# Altium PCB PCB.PcbDoc
Units mil, origin at the board's own origin, x right, y up, seen from the top; angles counter-clockwise.
Board outline 2345 x 2670 mil, 2 copper layers (Top Layer, Bottom Layer); 22 components, 27 nets, 129 pads, 10 vias.
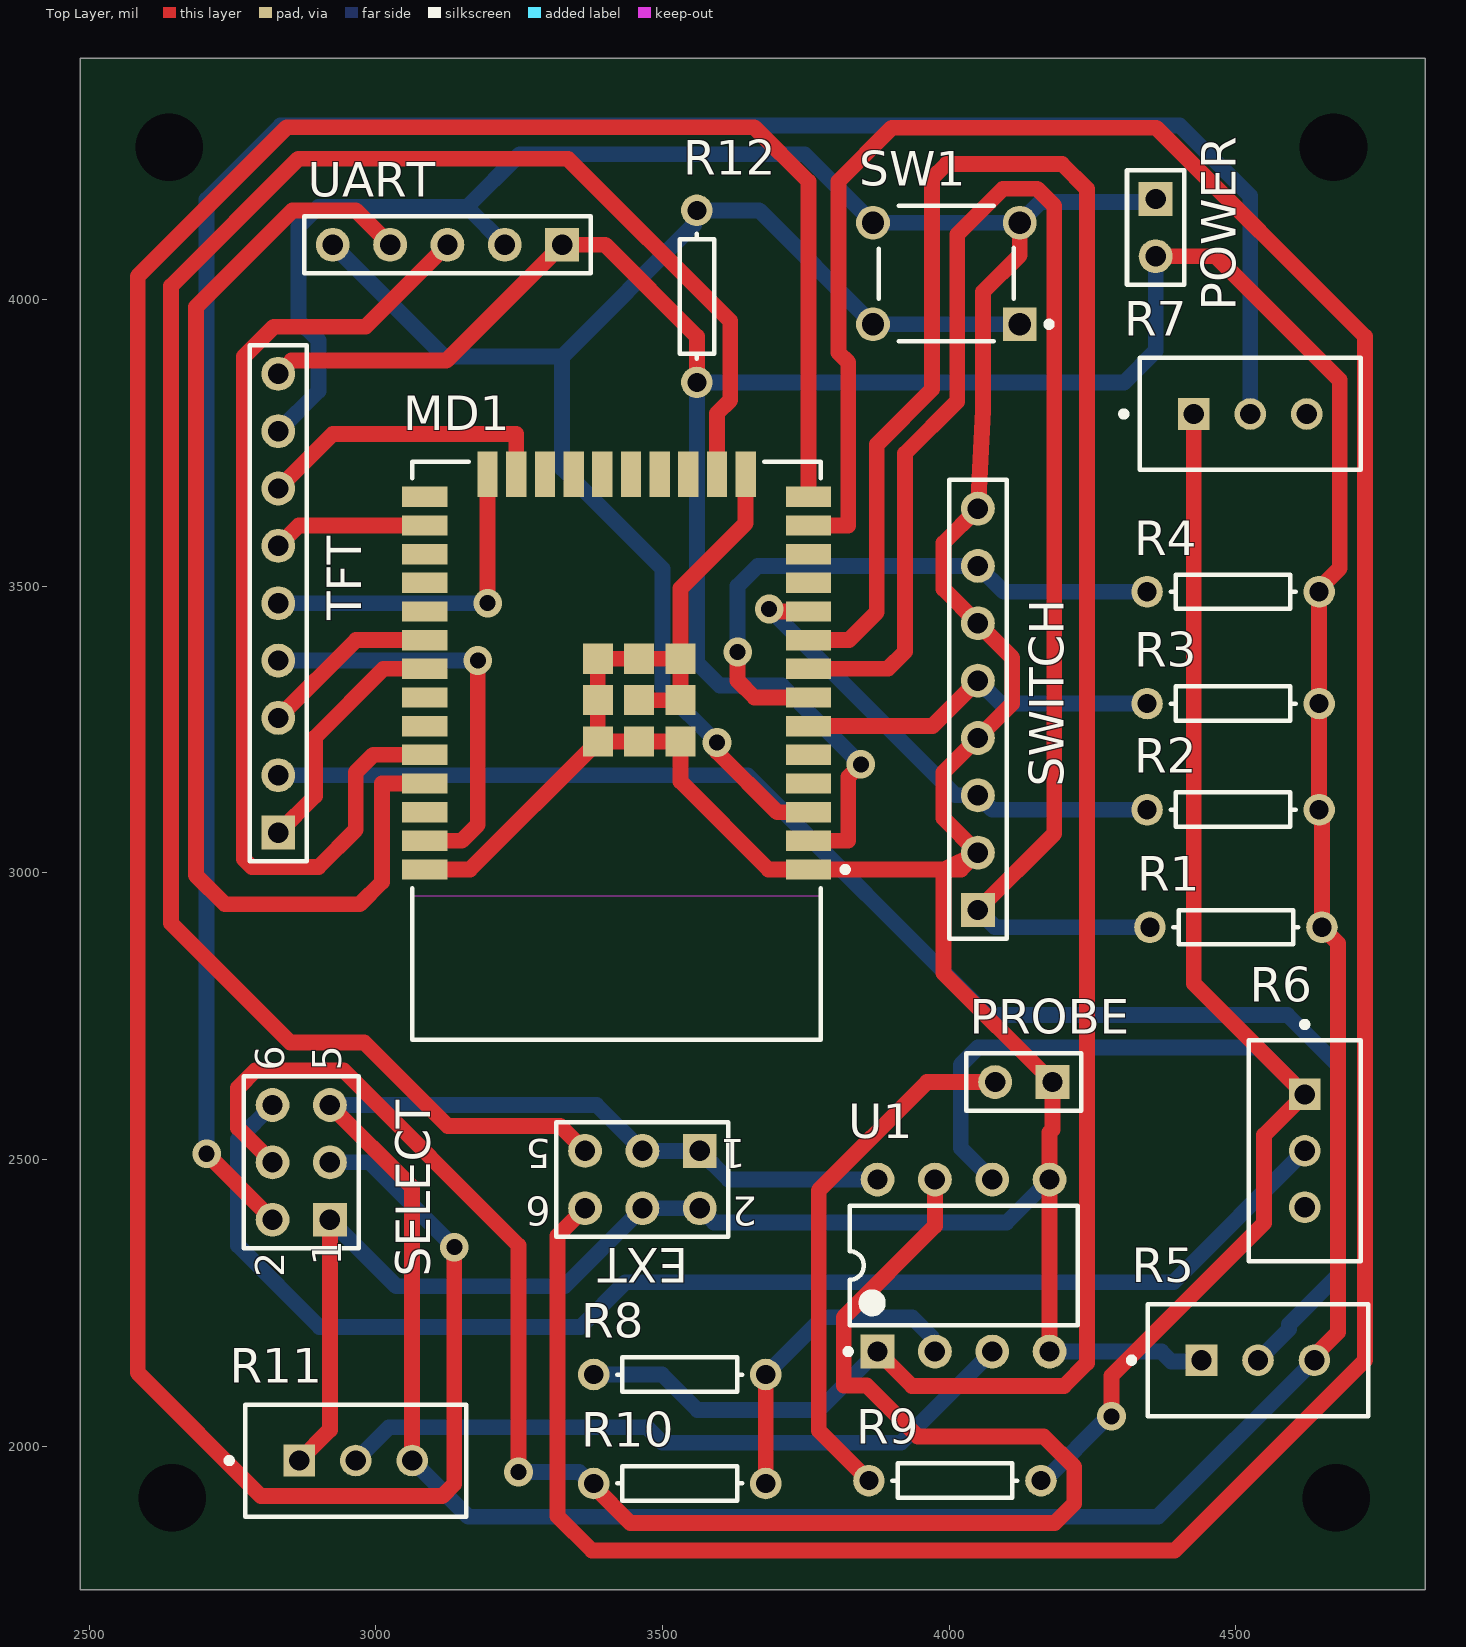
[diagram p0: Top Layer view]
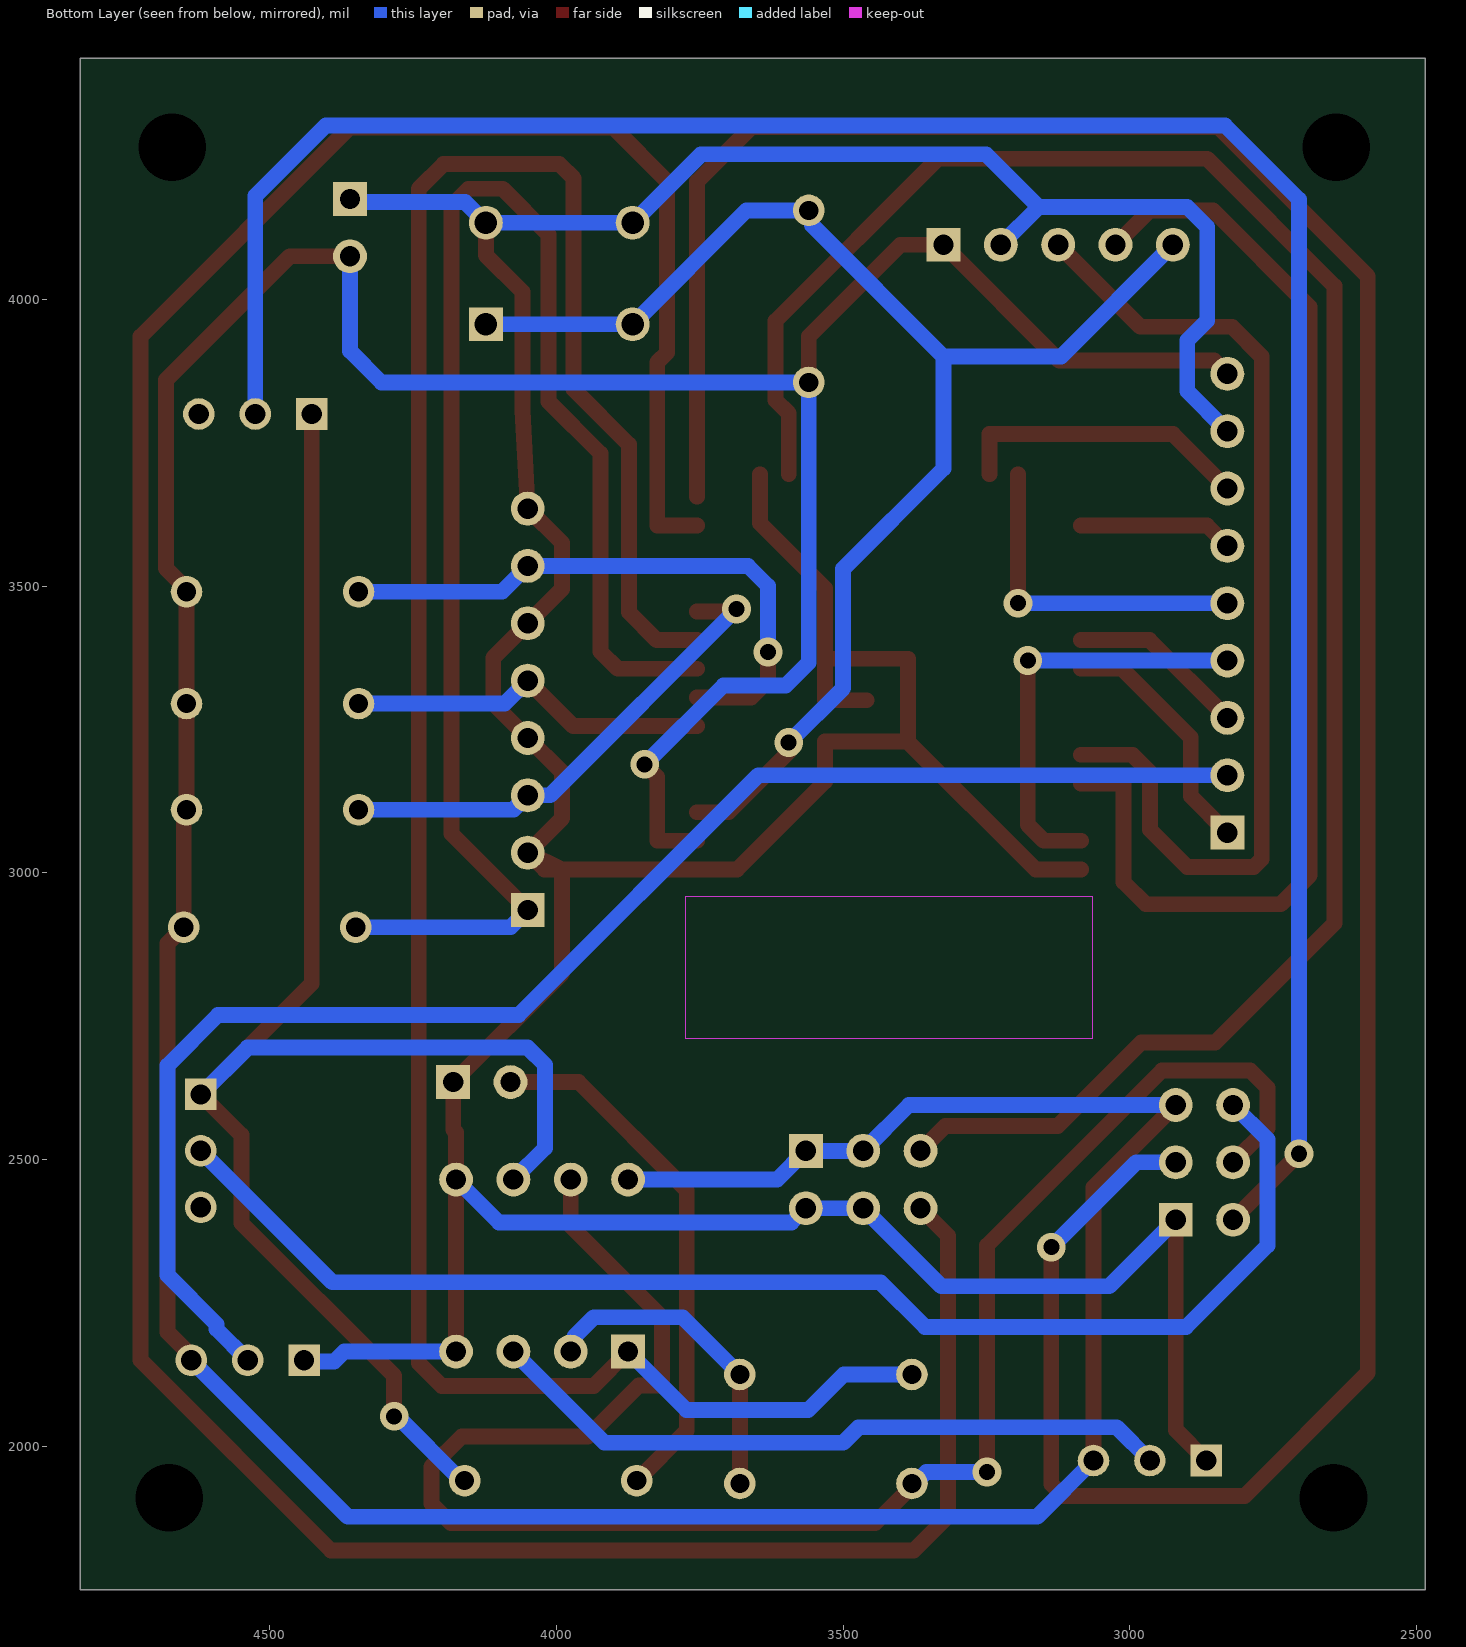
[diagram p1: Bottom Layer view, seen from below]

## Layer stack, top to bottom
Top Solder: solder mask 0.4, Solder Resist, Dk 3.5
Top Layer: signal copper 1.4
Dielectric 1: dielectric 12.6, FR-4, Dk 4.8
Bottom Layer: signal copper 1.4
Bottom Solder: solder mask 0.4, Solder Resist, Dk 3.5

## Board outline
2485,1750 4830,1750 4830,4420 2485,4420

## Design rules (kind name [scope] priority, off if disabled: settings)
Clearance [All] p1: gap=19.68 ignorepadtopadclearanceinfootprint=FALSE except(0: Arc-Hole Track-Hole SMDPad-Hole THPad-Hole Via-Hole Fill-Hole Poly-Hole Region-Hole Text-Hole; 10: Text-Text; 11.81: SMDPad-SMDPad SMDPad-THPad SMDPad-Via SMDPad-Fill SMDPad-Poly SMDPad-Region SMDPad-Text; 15.75: Arc-Arc Arc-Track Arc-SMDPad Arc-THPad Arc-Via Arc-Fill Arc-Poly Arc-Region Arc-Text Track-Track Track-SMDPad Track-THPad Track-Via Track-Fill Track-Poly Track-Region Track-Text)
PolygonConnect [All] p1: connectstyle=Relief reliefconductorwidth=10 reliefentries=4 polygonreliefangle="90 Angle" airgapwidth=10
RoutingVias [All] p1: holewidth=28 width=50 viastyle="Through Hole" minholewidth=28 minwidth=50 maxholewidth=28 maxwidth=50
SolderMaskExpansion [All] p1: expansion=4 istentingtop=FALSE
Width [All] p1: maxlimit=31.5 minlimit=23.62 preferedwidth=27.56 minimp=50.000000 maximp=50.000000 favimp=50.000000
30 further rules are at their usual default settings.

## Components (designator, comment, footprint, x,y, rotation, side; value= is the part's Value field where it differs from the comment)
EXT "Header 3X2" HDR2X3 3565,2515 r180 top
MD1 "ESP32-WROOM-32" FP-ESP32-WROOM-32-MFG 3420,3212.72 r180 top
POWER "Header 2" HDR1X2 4360,4175 r270 top
PROBE "Header 2" HDR1X2 4180,2635 r180 top
R1 "Res1" AXIAL-0.3 4500,2905 r0 top value=10K
R2 "Res1" AXIAL-0.3 4495,3110 r0 top value=10K
R3 "Res1" AXIAL-0.3 4495,3295 r0 top value=10K
R4 "Res1" AXIAL-0.3 4495,3490 r0 top value=10K
R5 "PV36W102C01B00" FP-PV36W-MFG 4538.43,2150 r180 top value=1kΩ
R6 "10K" FP-PV36W-MFG 4620,2515 r90 top value=1kΩ
R7 "100K" FP-PV36W-MFG 4525,3800 r180 top value=1kΩ
R8 "Res1" AXIAL-0.3 3530,2125 r0 top value=100K
R9 "Res1" AXIAL-0.3 4010,1940 r180 top value=100K
R10 "Res1" AXIAL-0.3 3530,1935 r180 top value=100K
R11 "100K" FP-PV36W-MFG 2965,1975 r180 top value=1kΩ
R12 "Res1" AXIAL-0.3 3560,4005 r90 top value=10K
SELECT "Header 3X2" HDR2X3 2920,2395 r90 top
SW1 "1825910-6" TECO-1825910-6_V 3995,4045 r180 top
SWITCH "Header 8" HDR1X8 4050,2935 r90 top
TFT "Header 9" HDR1X9 2830,3070 r90 top
U1 "LM358N" ONSC-PDIP-8-626-05_M 4025,2315 r90 top
UART "Header 5" HDR1X5 3325,4095 r180 top

## Footprints (in the part's own frame and the unit in brackets; to place one, negate y for a bottom-side part, rotate by r counter-clockwise, add the part's x,y. Pads: shape width x height; smd on the part's side, far side on the other; paste and mask are expansions set on the pad)
AXIAL-0.3 [mm] "Axial Device, Thru-Hole; 2 Leads; 0.3 in Pin Spacing"
  round 1.4 hole 0.85: 1(-3.81,0) 2(3.81,0)
  silkscreen extent -2.77,-0.76 2.77,0.76
FP-ESP32-WROOM-32-MFG [mm]
  rect 2x0.9 smd paste+0 mask+0: 1(-8.5,5.26) 2(-8.5,3.99) 3(-8.5,2.72) 4(-8.5,1.45) 5(-8.5,0.18) 6(-8.5,-1.09) 7(-8.5,-2.36) 8(-8.5,-3.63) 9(-8.5,-4.9) 10(-8.5,-6.17) 11(-8.5,-7.44) 12(-8.5,-8.71) 13(-8.5,-9.98) 14(-8.5,-11.25) 25(8.5,-11.25) 26(8.5,-9.98) 27(8.5,-8.71) 28(8.5,-7.44) 29(8.5,-6.17) 30(8.5,-4.9) 31(8.5,-3.63) 32(8.5,-2.36) 33(8.5,-1.09) 34(8.5,0.18) 35(8.5,1.45) 36(8.5,2.72) 37(8.5,3.99) 38(8.5,5.26)
  rect 0.9x2 smd paste+0 mask+0: 15(-5.715,-12.25) 16(-4.445,-12.25) 17(-3.175,-12.25) 18(-1.905,-12.25) 19(-0.635,-12.25) 20(0.635,-12.25) 21(1.905,-12.25) 22(3.175,-12.25) 23(4.445,-12.25) 24(5.715,-12.25)
  rect 1.33x1.33 smd paste+0 mask+0: 39(-2.835,-0.405) 39(-2.835,-4.075) 39(-2.835,-2.24) 39(-1,-0.405) 39(-1,-2.24) 39(-1,-4.075) 39(0.835,-0.405) 39(0.835,-2.24) 39(0.835,-4.075)
  Keep-Out Layer region: -9,6.45 9,6.45 9,12.75 -9,12.75
  Keep-Out Layer region: -9,6.45 9,6.45 9,12.75 -9,12.75
  silkscreen extent -10.25,-12.8 9.05,12.8, body extent -9.6,-13.35 9.6,12.9, height 0.25
FP-PV36W-MFG [mm]
  rect 1.4x1.4 hole 0.9 paste-1000 mask+0: 1(2.5,0)
  round 1.4 hole 0.9 paste-1000 mask+0: 2(0,0) 3(-2.5,0)
  silkscreen extent -4.89,-2.48 5.72,2.48, body extent -4.99,-2.58 4.99,2.58, height 0.25
HDR1X2 [mm] "Connector; Header; 2 Position"
  rect 1.5x1.5 hole 0.9: 1(0,0)
  round 1.5 hole 0.9: 2(2.54,0)
  silkscreen extent -1.27,-1.27 3.81,1.27
HDR1X5 [mm] "Connector; Header; 5 Position"
  rect 1.5x1.5 hole 0.9: 1(0,0)
  round 1.5 hole 0.9: 2(2.54,0) 3(5.08,0) 4(7.62,0) 5(10.16,0)
  silkscreen extent -1.27,-1.27 11.43,1.27
HDR1X8 [mm] "Connector; Header; 8 Position"
  rect 1.5x1.5 hole 0.9: 1(0,0)
  round 1.5 hole 0.9: 2(2.54,0) 3(5.08,0) 4(7.62,0) 5(10.16,0) 6(12.7,0) 7(15.24,0) 8(17.78,0)
  silkscreen extent -1.27,-1.27 19.05,1.27
HDR1X9 [mm] "Connector; Header; 9 Position"
  rect 1.5x1.5 hole 0.9: 1(0,0)
  round 1.5 hole 0.9: 2(2.54,0) 3(5.08,0) 4(7.62,0) 5(10.16,0) 6(12.7,0) 7(15.24,0) 8(17.78,0) 9(20.32,0)
  silkscreen extent -1.27,-1.27 21.59,1.27
HDR2X3 [mm] "Connector; Header; 3x2 Position"
  rect 1.5x1.5 hole 0.9: 1(0,0)
  round 1.5 hole 0.9: 2(0,2.54) 3(2.54,0) 4(2.54,2.54) 5(5.08,0) 6(5.08,2.54)
  silkscreen extent -1.27,-1.27 6.35,3.81
ONSC-PDIP-8-626-05_M [mm] "DIP, 8-Leads, Body 10x7.1mm, Pitch 2.54mm"
  rect 1.5x1.5 hole 0.9: 1(-3.81,3.81)
  round 1.5 hole 0.9: 2(-3.81,1.27) 3(-3.81,-1.27) 4(-3.81,-3.81) 5(3.81,-3.81) 6(3.81,-1.27) 7(3.81,1.27) 8(3.81,3.81)
  silkscreen extent -3.93,-5.05 2.65,5.23, body extent -3.95,-5 3.95,5, height 5.33
TECO-1825910-6_V [mm] "Switch, 4-Leads, Body 5.99x5.99mm"
  rect 1.5x1.5 hole 0.99: 1(-3.25,2.25)
  round 1.5 hole 0.99: 2(3.25,2.25) 3(-3.25,-2.25) 4(3.25,-2.25)
  silkscreen extent -4.68,-3 3,3, body extent -3,-2.99 2.99,3, height 5

## Part data
EXT SELECT: "Header, 3-Pin, Dual row", LatestRevisionDate=17-Jul-2002, LatestRevisionNote="Re-released for DXP Platform.", Publisher="Altium Limited"
MD1: library part CMP-194065-000008-1, "RX TXRX MOD WIFI SURFACE MOUNT", Case/Package=SMD/SMT, Frequency=2.5GHz, Max Operating Temperature=85°C, Min Operating Temperature=-40°C, Operating Supply Voltage=3.6V, Package Quantity=550, Data Rate=150Mbps, Mount="Surface Mount", Packaging="Cut Tape", Sensitivity=-98dBm, Weight=0.088185oz
POWER PROBE: "Header, 2-Pin", LatestRevisionDate=17-Jul-2002, LatestRevisionNote="Re-released for DXP Platform.", Publisher="Altium Limited"
R1 R2 R3 R4 R8 R9 R10 R12: "Resistor", LatestRevisionDate=17-Jul-2002, LatestRevisionNote="Re-released for DXP Platform.", PackageDescription="Axial Device, Thru-Hole; 2 Leads; 0.3 in Pin Spacing", PackageReference=AXIAL-0.3, Published=8-Jun-2000, Publisher="Altium Limited"
R5: library part CMP-07234-000009-1, "TRIMMER 1K OHM 0.5W PC PIN TOP", Manufacturer=Bourns, Package=PV36W, Power Rating=0.5W, Resistance=1kΩ, Temperature="-55°C to +125°C", Temperature Coefficient=100ppm/°C, Temperature Range High=+125°C, Temperature Range Low=-55°C, Tolerance=10%, Automotive=No, Category=Res, ComponentLink2Description=Datasheet, ComponentLink2URL=https://www.bourns.com/docs/Product-Datasheets/pv36.pdf, Composition=Cermet, Device Class L1="Passive Components", Device Class L2=Resistors, Device Class L3="Variable Resistors and Potentiometers", Digikey Description="TRIMMER 1K OHM 0.5W PC PIN TOP", Height=12.05mm, Lead Free=Yes, Manufacturer Part Number=PV36W102C01B00, Mouser Description="Trimmer Resistors - Through Hole 1.0Kohms 10mm Square 25turn", Octopart=https://octopart.com/pv36w102c01b00-bourns-71612321, RoHS=TRUE, Series=PV36, Standoff Height=0.38mm
R6 R7 R11: library part CMP-07234-000009-1, "TRIMMER 1K OHM 0.5W PC PIN TOP", Manufacturer=Bourns, Manufacturer Part Number=PV36W102C01B00, Package=PV36W, Power Rating=0.5W, Resistance=1kΩ, Temperature="-55°C to +125°C", Temperature Coefficient=100ppm/°C, Temperature Range High=+125°C, Temperature Range Low=-55°C, Tolerance=10%, Automotive=No, Category=Res, ComponentLink2Description=Datasheet, ComponentLink2URL=https://www.bourns.com/docs/Product-Datasheets/pv36.pdf, Composition=Cermet, Device Class L1="Passive Components", Device Class L2=Resistors, Device Class L3="Variable Resistors and Potentiometers", Digikey Description="TRIMMER 1K OHM 0.5W PC PIN TOP", Height=12.05mm, Lead Free=Yes, Mouser Description="Trimmer Resistors - Through Hole 1.0Kohms 10mm Square 25turn", Octopart=https://octopart.com/pv36w102c01b00-bourns-71612321, RoHS=TRUE, Series=PV36, Standoff Height=0.38mm
SW1: library part CMP-1684-00021-1, "Tact Switch, SPST-NO, 0.05 A, -35 to 85 degC, 4-Pin THD, RoHS, Bulk", Actuator Color=Black, Contact Rating @ Voltage=0.05A@24VDC, Dielectric Strength=500VAC, Manufacturer="TE Connectivity", Maximum AC Voltage Rating=N/A, Maximum Contact Resistance=100mOhm, Maximum DC Voltage Rating=24V, Minimum Insulation Resistance=100MOhm, Operating Temperature=-35to85C, Package Description="4-Pin Through Hole Device, Body 5.99 x 5.99 mm, Pitch 6.5 mm", Package Reference=THD, Actuator Length=1.4mm, Actuator Material=PolybutyleneTerephthalate, Actuator Style=RoundButton, Base Material=N/A, Body Orientation=Straight, Bushing Type=Unthreaded, Contact Material=CopperAlloy, Contact Plating=Silver, Datasheet URL=http://www.te.com/commerce/DocumentDelivery/DDEController?Action=showdoc&DocId=Customer+Drawing%7F1825910%7FC9%7Fpdf%7FEnglish%7FENG_CD_1825910_C9.pdf%7F1825910-6, Datasheet Version="Rev. C9", Dimension=5.99x5mm, Electrical Life=100000Cycles, Family=1825910, Function=MomentaryContact, Housing Material=N/A, Illumination=N/R, Manufacturer URL=http://www.te.com, Mechanical Life=100000Cycles, Mounting=ThroughHole, Packaging=N/A, Part No=1825910-6, Pole Throw Configuration=SPST, Product Weight=N/A, RoHS=Yes, Seal Description=N/A, Seal Location=N/A, Switch Configuration=OFF(ON), Terminal Type=PCPins, Thread Size=N/R
SWITCH: "Header, 8-Pin", LatestRevisionDate=17-Jul-2002, LatestRevisionNote="Re-released for DXP Platform.", Publisher="Altium Limited"
TFT: "Header, 9-Pin", LatestRevisionDate=17-Jul-2002, LatestRevisionNote="Re-released for DXP Platform.", Publisher="Altium Limited"
U1: library part CMP-1310-00098-1, "Single Supply Dual Operational Amplifier, 3 to 32 V, 0 to 70 degC, 8-Pin PDIP, Tube", Manufacturer="On Semiconductor", ComponentLink1Description="Manufacturer URL", ComponentLink1URL=http://www.onsemi.com/, ComponentLink2Description=Datasheet, ComponentLink2URL=http://www.onsemi.cn/pub_link/Collateral/LM358-D.PDF, ComponentLink3Description="Package Specification", ComponentLink3URL=http://www.onsemi.com/pub_link/Collateral/LM211-D.PDF, DatasheetVersion="Rev. 27", Mounting Technology="Through Hole", PackageDescription="8-Pin Plastic Dual-In Line Package, Body 9.52 x 6.605 mm, Pitch 2.54 mm", PackageReference=PDIP-8-626-05, PackageVersion="Rev. M, 04/2010", Packing=Tube, PartNumber=LM358N, RoHS=FALSE, VCC Max (V)=32, VCC Min (V)=3
UART: "Header, 5-Pin", LatestRevisionDate=17-Jul-2002, LatestRevisionNote="Re-released for DXP Platform.", Publisher="Altium Limited"

## Free pads (board coordinates)
  round 60 hole 118.11: 2(2640,4265) 2(2645,1910) 2(4670,4265) 2(4675,1910)

## Via types
v1: diameter 50, hole 28, Top Layer to Bottom Layer, 10 vias

## Nets (pads, with @x,y where several pads share a name; then routed paths per layer and width w, separated by ;. In a path a pad name is that pad's centre, name@x,y a point inside that pad or via, vN(x,y) a via of type N, cw(c..) or ccw(c..) an arc to the next point about the centre after c; other vN are vias at no path point)
ADC_IN: MD1.9 R8.1 U1.1 | length 4251
  Top Layer w27.56: MD1.9 3825,3405.63 3873.54,3454.17 3873.54,3746.54 3970,3843 3970,4210.84 3995.11,4235.95 4196.69,4235.95 4240,4192.64 4240,2145 4200,2105 3935,2105 U1.1
  Bottom Layer w27.56: R8.1 3499,2125 3561,2063 3773,2063 U1.1
BTN1: MD1.8 R1.1 SWITCH.1 | length 2755.6
  Top Layer w27.56: MD1.8 3893,3355.63 3923,3385.63 3923,3731 4014,3822 4014,4113 4093.64,4192.64 4153.36,4192.64 4183,4163 4183,3068 SWITCH.1
  Bottom Layer w27.56: SWITCH.1 4080,2905 R1.1
BTN2: MD1.10 R2.1 SWITCH.3 | length 879.4
  Top Layer w27.56: v1(3686,3460) 3690.37,3455.63 MD1.10
  Bottom Layer w27.56: v1(3686,3460) 4011,3135 SWITCH.3 4075,3110 R2.1@4350,3110
BTN3: MD1.6 R3.1 SWITCH.5 | length 639.8
  Top Layer w27.56: MD1.6 3970.63,3255.63 SWITCH.5
  Bottom Layer w27.56: SWITCH.5 4090,3295 R3.1
BTN4: MD1.7 R4.1 SWITCH.7 | length 1042.9
  Top Layer w27.56: v1(3631,3385) 3631,3335 3660.37,3305.63 MD1.7
  Bottom Layer w27.56: v1(3631,3385) 3631,3500 3666,3535 SWITCH.7 4095,3490 R4.1@4340,3490
CS: MD1.23 TFT.7 | length 524.4
  Top Layer w27.56: TFT.7 2925,3765 3245,3765 MD1.23
DC: MD1.24 TFT.5 | length 590
  Top Layer w27.56: v1(3195,3470) MD1.24
  Bottom Layer w27.56: TFT.5 v1(3195,3470)
DTR: MD1.3 R12.2 SW1.1 SW1.2 UART.5 | length 2482.7
  Top Layer w27.56: v1(3595,3227) 3595,3210.63 3700,3105.63 MD1.3
  Bottom Layer w27.56: UART.5 3120,3900 3325,3900 ; v1(3595,3227) 3500,3322 3500,3530 3325,3705 3325,3900 ; SW1.1 SW1.2 3668.47,4155 R12.2 3554.73,4149.73 3554.73,4129.73 3325,3900
GND: EXT.2 EXT.4 MD1.1 MD1.15 MD1.38 MD1.39 POWER.1 PROBE.1 R5.1 R11.1 SELECT.1 SW1.3 SW1.4 SWITCH.2 SWITCH.4 SWITCH.6 SWITCH.8 TFT.8 U1.4 U1.5 UART.2 | length 8488
  Top Layer w27.56: R11.1 2920,2028.43 SELECT.1 ; MD1.38 3164.09,3005.63 MD1.39@3387.13,3228.66 ; MD1.39@3459.37,3300.91 3531.61,3300.91 MD1.39@3531.61,3373.15 ; MD1.15 3645,3609.39 3531.61,3496 MD1.39@3531.61,3373.15 ; SW1.3 4122.95,4076.95 4059,4013 4059,3806 SWITCH.8 3990,3575 3990,3495 SWITCH.6 4110,3375 4110,3295 SWITCH.4 3990,3175 3990,3095 SWITCH.2 ; U1.4 U1.5 4175,2547 4180,2552 PROBE.1 3990,2825 3990,3005.63 ; MD1.39@3387.13,3228.66 3387.13,3300.91 3387.13,3373.15 3459.37,3373.15 MD1.39@3531.61,3373.15 ; MD1.39@3387.13,3228.66 3459.37,3228.66 3531.61,3228.66 3531.61,3159.02 3685,3005.63 MD1.1 3990,3005.63 ; 3990,3005.63 4020.63,3005.63 SWITCH.2 ; 3990,3005.63 SWITCH.2
  Bottom Layer w27.56: TFT.8 2900,3840 2900,3928 2865,3963 2865,4126 2900,4161 3159,4161 ; SELECT.1 3036,2279 3329,2279 EXT.4 EXT.2 3590,2390 4100,2390 U1.5 ; UART.2 3159,4161 ; U1.4 4370,2165 4387.25,2147.75 4437.75,2147.75 R5.1 ; POWER.1@4360,4169.42 4158.79,4169.42 SW1.3 SW1.4 3747.63,4253 3251,4253 3159,4161
IO13: EXT.5 MD1.16 | length 3458.1
  Top Layer w27.56: EXT.5 3321.69,2558.31 3125.69,2558.31 2980,2704 2851,2704 2643,2912 2643,4023 2865,4245 3335,4245 3618,3962 3618,3824 3595,3801 MD1.16
IO14: EXT.6 MD1.13 | length 5696.3
  Top Layer w27.56: EXT.6 3317,2367 3317,1878 3377,1818 4393,1818 4725,2150 4725,3935 4361,4299 3900,4299 3807,4206 3807,3907 3824,3890 3824,3605.63 MD1.13
LED: R5.2 TFT.2 | length 2629.4
  Bottom Layer w27.56: TFT.2 3648,3170 4066,2752 4590,2752 4678,2664 4678,2298 4592.67,2212.67 4592.67,2204.25 R5.2
MISO: MD1.31 TFT.1 | length 433.5
  Top Layer w27.56: TFT.1 2893.91,3133.91 2893.91,3235.98 3013.56,3355.63 MD1.31
MOSI: MD1.37 TFT.4 | length 738.6
  Top Layer w27.56: MD1.37 3150,3055.63 3178,3083.63 v1(3178,3370)
  Bottom Layer w27.56: TFT.4 v1(3178,3370)
NetPROBE_2: PROBE.2 R9.2 | length 927.9
  Top Layer w27.56: R9.2 3772.64,2027.36 3772.64,2446.15 3961.48,2635 PROBE.2
NetR6_1: R6.1 R7.1 R9.1 U1.6 | length 3006.1
  Top Layer w27.56: v1(4283,2052) 4283,2123 4549,2389 4549,2542.43 R6.1 4426.57,2806.85 R7.1
  Bottom Layer w27.56: U1.6 4020,2520 4020,2665 4050,2695 4538.43,2695 R6.1 ; R9.1 4165.5,1940 4277.5,2052 v1(4283,2052)
NetR6_2: R6.2 SELECT.6 | length 2315.8
  Bottom Layer w27.56: SELECT.6 2760,2535 2760,2350 2902,2208 3357,2208 3435,2286 4391,2286 R6.2
NetR7_2: R7.2 SELECT.2 | length 4131
  Top Layer w27.56: v1(2705,2510) SELECT.2
  Bottom Layer w27.56: v1(2705,2510) 2705,4174 2834,4303 4402,4303 4525,4180 R7.2
NetR8_2: R8.2 R10.1 U1.2 | length 563
  Top Layer w27.56: R10.1 R8.2
  Bottom Layer w27.56: R8.2 3780,2225 3935,2225 3968.97,2191.03 3968.97,2171.03 U1.2
NetR10_2: R10.2 SELECT.4 U1.7 | length 3150.3
  Top Layer w27.56: SELECT.4 2760,2555 2760,2625 2790,2655 2944,2655 3249,2350 v1(3249,1955) ; R10.2 3380,1930 3444,1866 4184,1866 4218,1900 4218,1964 4165,2017 3945.25,2017 3856.3,2105.94 3815.94,2105.94 3815.94,2225 3975,2384.06 U1.7
  Bottom Layer w27.56: v1(3249,1955) 3355,1955 3375,1935 R10.2
NetR11_2: R11.2 U1.3 | length 1211.1
  Bottom Layer w27.56: R11.2 3023,2033 3473,2033 3500,2006 3916,2006 U1.3
RESET: MD1.26 TFT.6 | length 270.1
  Top Layer w27.56: TFT.6 2865.63,3605.63 MD1.26
RX: MD1.35 UART.4 | length 2031.9
  Top Layer w27.56: UART.4 2965,4155 2855,4155 2686.31,3986.31 2686.31,2995.69 2737,2945 2972,2945 3011,2984 3011,3155.63 MD1.35
SCK: MD1.30 TFT.3 | length 311.5
  Top Layer w27.56: TFT.3 2965.63,3405.63 MD1.30
SS: MD1.14 SELECT.3 | length 5119.3
  Top Layer w27.56: v1(3137,2347) 3137,1934 3116,1913 2800,1913 2585,2128 2585,4040 2845,4300 3660,4300 3754.65,4205.35 MD1.14
  Bottom Layer w27.56: SELECT.3 2989,2495 v1(3137,2347)
TX: MD1.34 UART.3 | length 1772.5
  Top Layer w27.56: MD1.34 2995.63,3205.63 2965,3175 2965,3075 2900,3010 2784,3010 2770,3024 2770,3900 2822,3952 2982,3952 UART.3
VCC: EXT.1 EXT.3 MD1.2 POWER.2 R1.2 R2.2 R3.2 R4.2 R5.3 R11.3 R12.1 SELECT.5 TFT.9 U1.8 UART.1 | length 8599.6
  Top Layer w27.56: TFT.9 2853,3893 3123,3893 UART.1 3400,4095 3560,3935 R12.1 ; SELECT.5 3063.43,2451.57 R11.3 ; MD1.2 3824,3055.63 3824,3167 v1(3846,3189) ; POWER.2 4465,4075 4681,3859 4681,3531 R4.2@4640,3490 ; R5.3 4636.85,2157.46 4678,2198.61 4678,2877 R1.2 4650,3105 R2.2 R3.2 R4.2
  Bottom Layer w27.56: SELECT.5 3385,2595 EXT.3 EXT.1 3615,2465 U1.8 ; R11.3 3161.43,1877 4363.85,1877 R5.3 ; v1(3846,3189) 3708.47,3326.53 3600,3326.53 3560,3366.53 R12.1 4305,3855 4360,3910 POWER.2
pads on no net: MD1.4 MD1.5 MD1.11 MD1.12 MD1.17 MD1.18 MD1.19 MD1.20 MD1.21 MD1.22 MD1.25 MD1.27 MD1.28 MD1.29 MD1.32 MD1.33 MD1.36 R6.3 R7.3

## Silkscreen, mask and mechanical layers (free items; w line width, h text height)
Board Outline:
  the board outline again, w10

## Text inside footprints (layer, text, board x,y; h text height)
EXT: Top Overlay "6" at 3305,2435 h50 r180; Top Overlay "5" at 3305,2535 h50 r180; Top Overlay "2" at 3665,2435 h50 r180; Top Overlay "1" at 3645,2535 h50 r180
SELECT: Top Overlay "6" at 2840,2655 h50 r90; Top Overlay "5" at 2940,2655 h50 r90; Top Overlay "2" at 2840,2295 h50 r90; Top Overlay "1" at 2940,2315 h50 r90